# Altium PCB CZ201C_V2.0.PcbDoc (part 1 of 2)
Units mm, origin at the board's own origin, x right, y up, seen from the top; angles counter-clockwise.
Board outline 73 x 60 mm, 2 copper layers (Top Layer, Bottom Layer); 64 components, 36 nets, 200 pads, 72 vias.
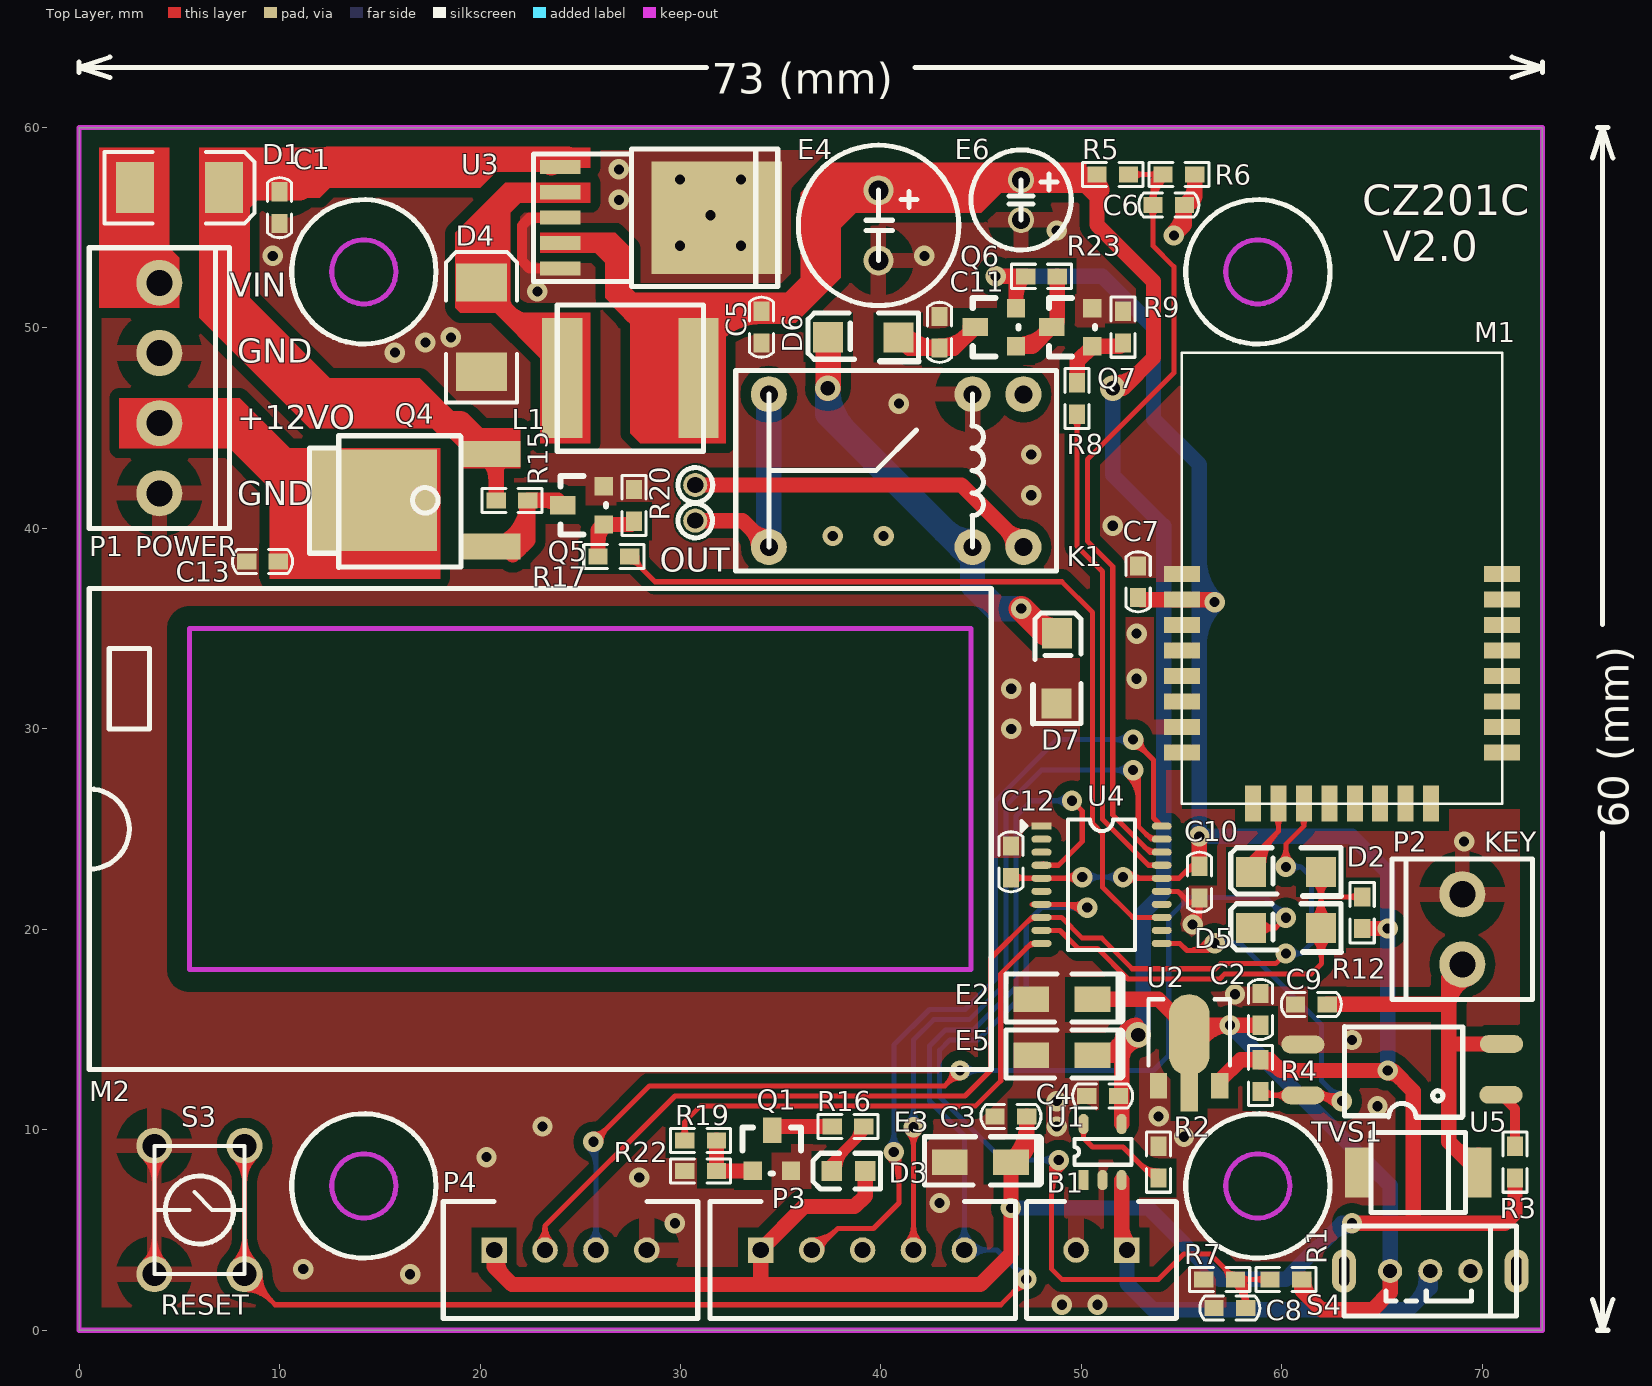
[diagram p0: Top Layer view]
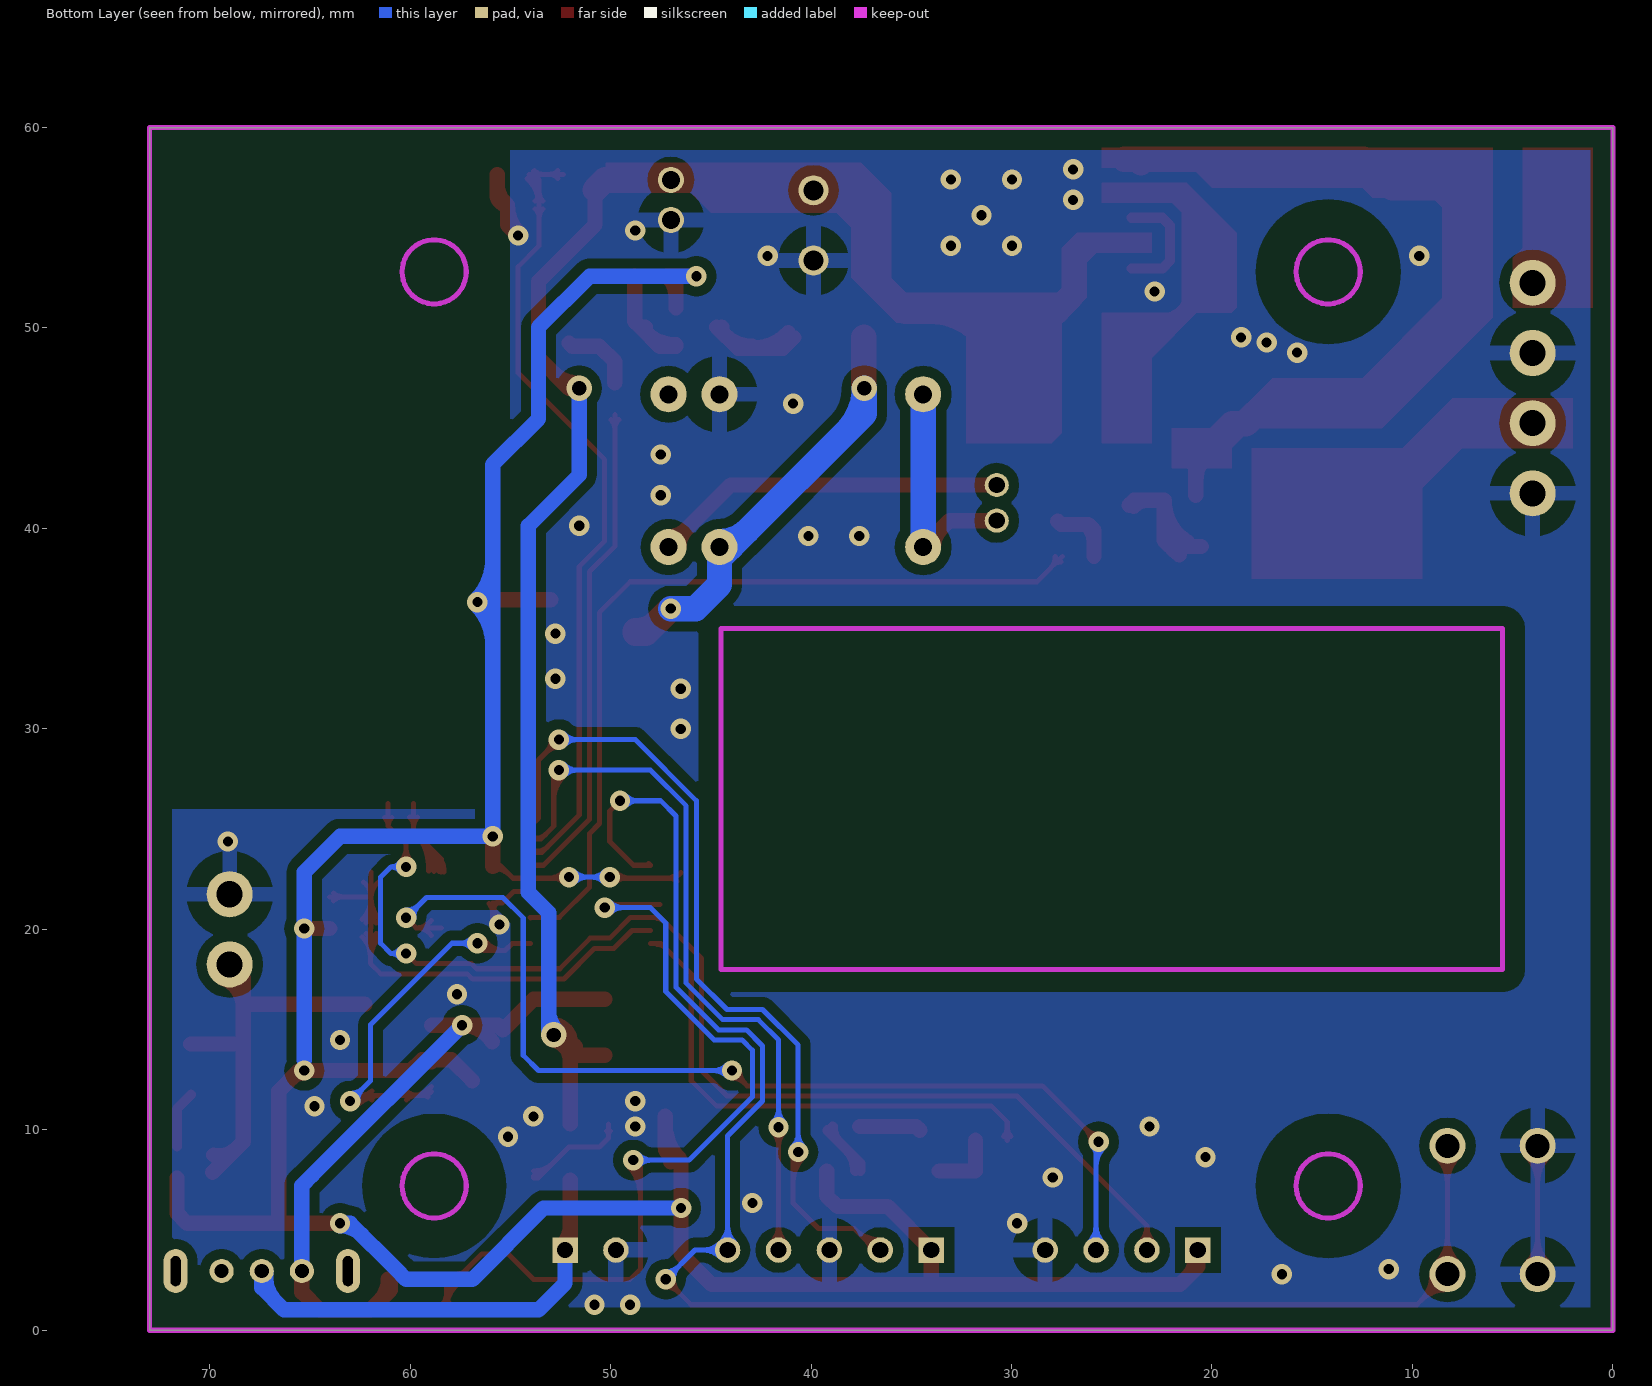
[diagram p1: Bottom Layer view, seen from below]

## Layer stack, top to bottom
Top Layer: signal copper 0.0356
Dielectric: dielectric 0.32, FR-4, Dk 4.8
Bottom Layer: signal copper 0.0356

## Board outline
0,0 73,0 73,60 0,60

## Design rules (kind name [scope] priority, off if disabled: settings)
Clearance "InPoygon to Keep-Out Layer" [InPolygon vs OnLayer('Keep-Out Layer')] p1: gap=1
Clearance "GND to Keep-Out Layer" [InNet('GND') vs OnLayer('Keep-Out Layer')] p2: gap=0.5
Clearance "GND to InPoygon" [InNet('GND') vs InPolygon] p3: gap=1
Clearance "Power Class" [InNetClass('Power Class')] p4: gap=0.5
Clearance "InPoygon to All" [InPolygon] p5: gap=0.5
Clearance [All] p6: gap=0.254
MinimumSolderMaskSliver [All] p1: minsoldermaskwidth=0
PlaneConnect [All] p1: planeconnectstyle=Relief reliefexpansion=0.508 reliefentries=4 reliefconductorwidth=0.508 reliefairgap=0.508
PolygonConnect IsVia [IsVia] p1: connectstyle=Direct reliefconductorwidth=0.254 reliefentries=4 polygonreliefangle="90 Angle"
PolygonConnect IsSMDPad [InSMTComponent] p2: connectstyle=Direct reliefconductorwidth=0.254 reliefentries=4 polygonreliefangle="90 Angle"
PolygonConnect [All] p3: connectstyle=Relief reliefconductorwidth=0.762 reliefentries=4 polygonreliefangle="90 Angle"
RoutingVias [All] p1: holewidth=0.711 width=1.27 viastyle="Through Hole" minholewidth=0.508 minwidth=1.016 maxholewidth=0.711 maxwidth=1.27
SilkToSilkClearance [All] p1: silktosilkclearance=0
SilkscreenOverComponentPads [All] p1: minsilkscreentomaskgap=0
SolderMaskExpansion [All] p1: expansion=0.102
Width [All] p1: maxlimit=25.4 minlimit=0.254 preferedwidth=0.254
24 further rules are at their usual default settings.

## Classes and differential pairs
net class "Power Class": +3.3V +5V +12V +12V_OUT +BAT +BAT_OUT +VIN

## Components (designator, comment, footprint, x,y, rotation, side; value= is the part's Value field where it differs from the comment)
B1 "3.7V" XH2.54-2P-BAT 51,4 r0 top locked
C1 "100nF" 0603_CN 10,56 r270 top
C2 "100nF" 0603_CN 58.928,16.002 r90 top
C3 "100nF" 0603_CN 46.482,10.668 r180 top
C4 "100nF" 0603_CN 51.054,11.684 r180 top
C5 "100nF" 0603_CN 34.036,50.038 r270 top
C6 "100nF" 0603_CN 54.356,56.134 r0 top
C7 "100nF" 0603_CN 52.832,37.338 r270 top
C8 "100nF" 0603_CN 57.404,1.1 r180 top
C9 "100nF" 0603_CN 61.468,16.256 r180 top
C10 "100nF" 0603_CN 55.88,22.352 r270 top
C11 "100nF" 0603_CN 42.926,49.784 r90 top
C12 "100nF" 0603_CN 46.482,23.368 r90 top
C13 "100nF" 0603_CN 9.144,38.354 r180 top
D1 "SS14" DO-214AC(SMA) 5,57 r180 top
D2 "1N4148" LL-34 60.198,22.86 r0 top
D3 "Red" 0603_LED 38.378,7.94 r0 top
D4 "SS14" DO-214AC(SMA) 20.066,50.038 r270 top
D5 "1N4148" LL-34 60.198,20.066 r0 top
D6 "1N4148" LL-34 39.116,49.53 r0 top
D7 "1N4148" LL-34 48.768,33.02 r270 top
E2 "10uF/6.3V" 3216_E 49.022,16.51 r180 top
E3 "10uF/6.3V" 3216_E 44.958,8.382 r180 top
E4 "470uF/16V" CS_470uF/16V 39.878,55.118 r270 top
E5 "10uF/6.3V" 3216_E 49.022,13.716 r180 top
E6 "100uF/16V" CS_100uF/16V 46.99,56.388 r270 top
K1 "HK4100F-DC3V-SHG" HK4100-DC5V-SHG 40.5,42.5 r270 top
L1 "33uH/1A" CDRH74 27.5,47.5 r0 top
M1 "E18-MS1PA2-IPX" E18-MS1PA2-IPX 63,32 r90 top locked
M2 "RF-CHJ-7787Z" RF-CHJ-7787Z 0.5,13 r0 top locked
P1 "POWER" KF3.5-4P 4,47 r270 top locked
P2 "KEY" KF3.5-2P 69,20 r90 top locked
P3 "SWD" XH2.54-5P 34,4 r0 top locked
P4 "ISP" XH2.54-4P 20.7,4 r0 top locked
Q1 "S8050" SOT-23 34.556,8.964 r0 top
Q4 "NCE01P13K" TO-252 17.272,41.402 r90 top
Q5 "S8050" SOT-23 25.146,41.148 r90 top
Q6 "SI2301DS" SOT-23 45.72,50.038 r90 top
Q7 "S8050" SOT-23 49.53,50.038 r90 top
R1 "1M" 0603_RN 60.198,2.54 r0 top
R2 "1.65K" 0603_RN 53.848,8.382 r270 top
R3 "1K" 0603_RN 71.628,8.382 r270 top
R4 "100K" 0603_RN 58.928,12.7 r90 top
R5 "10K" 0603_RN 51.562,57.658 r180 top
R6 "20K" 0603_RN 54.864,57.658 r180 top
R7 "1M" 0603_RN 56.896,2.54 r0 top
R8 "10K" 0603_RN 49.784,46.482 r270 top
R9 "100K" 0603_RN 52.07,50.038 r270 top
R12 "100K" 0603_RN 64.008,20.828 r270 top
R15 "100K" 0603_RN 21.59,41.402 r180 top
R16 "1K" 0603_RN 38.354,10.16 r0 top
R17 "10K" 0603_RN 26.67,38.608 r180 top
R19 "10K" 0603_RN 31,9.472 r180 top
R20 "100K" 0603_RN 27.686,41.148 r270 top
R22 "100K" 0603_RN 31,7.948 r0 top
R23 "100K" 0603_RN 48.006,52.578 r180 top
S3 "RESET" KEY-6*6MM-DIP 6,6 r270 top locked
S4 "SS12D07VG3" SS-12D07G3 67.4,3 r180 top locked
TVS1 "SMBJ6.8CA" DO-214AA(SMB) 66.802,7.874 r180 top
U1 "TP4054" SOT-23-5 51.054,8.89 r90 top
U2 "HT7333-A" SOT-89 55.372,12.192 r0 top
U3 "XL1507-5.0E1" TO-252-5 24,55.5 r270 top
U4 "STM32F030F4P6" TSSOP20 48.006,25.146 r0 top
U5 "PC817" SOP-4 66,13 r180 top

## Footprints (in the part's own frame and the unit in brackets; to place one, negate y for a bottom-side part, rotate by r counter-clockwise, add the part's x,y. Pads: shape width x height; smd on the part's side, far side on the other; paste and mask are expansions set on the pad)
0603_CN [mm] "SMD Resistor"
  rect 0.96x0.8 smd: 1(-0.79,0) 2(0.79,0)
  silkscreen extent -1.5,-0.6 1.5,0.6
0603_LED [mil] "SMD LED"
  rect 40x40 smd: A(33,0) K(-33,0)
  silkscreen extent -70,-35 63,35
0603_RN [mm] "SMD Resistor"
  rect 0.96x0.8 smd: 1(-0.79,0) 2(0.79,0)
  silkscreen extent -1.5,-0.6 1.5,0.6
3216_E [mm] "SMD Tantalum Capacitor"
  rect 1.78x1.27 smd: 1(-1.525,0) 2(1.525,0)
  silkscreen extent -2.92,-1.27 2.79,1.14
CDRH74 [mm]
  rect 2x6 smd: 1(-3.4,0) 2(3.4,0)
  silkscreen extent -3.65,-3.65 3.65,3.65
CS_100uF/16V [mm] "PTH  Electrolytic  Capacitor"
  round 1.3 hole 0.9: 1(-1,0) 2(1,0)
  silkscreen extent -2.5,-2.5 2.5,2.5
CS_470uF/16V [mm] "PTH  Electrolytic  Capacitor"
  round 1.5 hole 1: 1(-1.75,0) 2(1.75,0)
  silkscreen extent -4,-4 4,4
DO-214AA(SMB) [mm] "SMD Diode"
  rect 1.2x2.5 smd: A(3.05,0) K(-3.05,0)
  silkscreen extent -2.35,-2 2.35,2
DO-214AC(SMA) [mil] "SMD Diode"
  rect 75x100 smd: A(87.5,0) K(-87.5,0)
  silkscreen extent -147,-70 148,70
E18-MS1PA2-IPX [mm] "22.5mm*16mm*2.40mm-S"
  rect 0.8x1.8 smd: 1(5.716,7.987) 2(4.446,7.987) 3(3.176,7.987) 4(1.906,7.987) 5(0.636,7.987) 6(-0.634,7.987) 7(-1.904,7.987) 8(-3.174,7.987) 17(-3.174,-7.987) 18(-1.904,-7.987) 19(-0.634,-7.987) 20(0.636,-7.987) 21(1.906,-7.987) 22(3.176,-7.987) 23(4.446,-7.987) 24(5.716,-7.987)
  rect 1.8x0.8 smd: 9(-5.716,4.445) 10(-5.716,3.175) 11(-5.716,1.905) 12(-5.716,0.635) 13(-5.716,-0.635) 14(-5.716,-1.905) 15(-5.716,-3.175) 16(-5.716,-4.445)
  silkscreen extent -5.73,-8 16.77,8
HK4100-DC5V-SHG [mm]
  round 1.8 hole 0.9: 1(-4.191,-6.096) 1(3.429,-6.096) 2(-4.191,6.604) 3(3.429,6.604) 4(3.429,4.064) 5(-4.191,4.064)
  silkscreen extent -5.38,-7.75 4.62,8.25
KEY-6*6MM-DIP [mm]
  round 1.8 hole 1.2: 1(-3.2,2.25) 2(-3.2,-2.25) 3(3.2,-2.25) 4(3.2,2.25)
  silkscreen extent -3.2,-2.25 3.2,2.25
KF3.5-2P [mm]
  round 2.3 hole 1.3: 1(-1.75,0) 2(1.75,0)
  silkscreen extent -3.5,-3.5 3.5,3.5
KF3.5-4P [mm]
  round 2.3 hole 1.3: 1(-5.25,0) 2(-1.75,0) 3(1.75,0) 4(5.25,0)
  silkscreen extent -7,-3.5 7,3.5
LL-34 [mm] "SMD Diode"
  rect 1.5x1.5 smd: A(1.75,-0.008) K(-1.75,0.008)
  silkscreen extent -2.75,-1.19 2.75,1.21
RF-CHJ-7787Z [mm]
  Keep-Out Layer lines w0.254: 5,5 44,5 44,22 5,22 5,5
  silkscreen extent 0,0 45,24
SOP-4 [mil]
  oval 85x35 smd: 1(-194,49.5) 2(-195,-50.5) 3(195,-49.5) 4(195,50.5)
  silkscreen extent -119,-85 113,94
SOT-23 [mil] "SMD Triode Or Diode"
  rect 36x36 smd: 1(-37.5,-40) 2(37.5,-40)
  rect 36x50 smd: 3(0.5,40)
  silkscreen extent -58,-45 58,45
SOT-23-5 [mil]
  rect 40x20 smd: 1(-55,37.4)
  oval 40x20 smd: 2(-55,0) 3(-55,-37.4) 4(55,-37.4) 5(55,37.4)
  silkscreen extent -25,-57 26,55
SOT-89 [mil] "SMD Diode"
  rect 34x50 smd: 1(-60,0) 3(60,0)
  rect 34x100 smd: 2(0,0)
  oval 80x160 smd: 2(0,100)
  silkscreen extent -80,40 80,170
SS-12D07G3 [mm]
  oval 1.2x2.2 hole 0.5 slot 1.5 at 90 deg: 0(-4.3,0.05) 0(4.3,0.05)
  round 1.2 hole 0.7: 1(-2,0.05) 2(0,0.05) 3(2,0.05)
  silkscreen extent -4.3,-2.2 4.3,2.3
TO-252 [mm] "SMD IC"
  rect 1.3x3 smd: 1(-2.3,-3.245) 3(2.3,-3.245)
  rect 5.08x6.35 smd: 2(0,2.592)
  silkscreen extent -3.35,-1.78 3.22,5.79
TO-252-5 [mm] "SMD IC"
  rect 5.6x6.5 smd: 0(0,7.802)
  rect 0.7x2 smd: 1(-2.54,0) 2(-1.27,0) 3(0,0) 4(1.27,0) 5(2.54,0)
  silkscreen extent -3.42,-1.34 3.42,10.85
TSSOP20 [mm]
  rect 1x0.35 smd: 1(0,0)
  oval 1x0.35 smd: 2(0,-0.65) 3(0,-1.3) 4(0,-1.95) 5(0,-2.6) 6(0,-3.25) 7(0,-3.9) 8(0,-4.55) 9(0,-5.2) 10(0,-5.85) 11(6,-5.85) 12(6,-5.2) 13(6,-4.55) 14(6,-3.9) 15(6,-3.25) 16(6,-2.6) 17(6,-1.95) 18(6,-1.3) 19(6,-0.65) 20(6,0)
  silkscreen extent -1,-6.17 4.67,0.33
XH2.54-2P-BAT [mil]
  rect 50x50 hole 32: 1(50,0)
  round 50 hole 32: 2(-50,0)
  silkscreen extent -148,-135 148,95
XH2.54-4P [mil]
  rect 50x50 hole 32: 1(0,0)
  round 50 hole 32: 2(100,0) 3(200,0) 4(300,0)
  silkscreen extent -100,-135 400,95
XH2.54-5P [mil]
  rect 50x50 hole 32: 1(0,0)
  round 50 hole 32: 2(100,0) 3(200,0) 4(300,0) 5(400,0)
  silkscreen extent -100,-135 500,95

## Part data
B1: library part BATTERY
C1 C2 C3 C4 C5 C6 C7 C8 C9 C10 C11 C12 C13: library part Cap1
D1 D4: library part Diode-A
D2 D5 D6 D7: library part Diode-B
D3: library part LED
E2 E3 E5: library part "Cap Ta"
E4 E6: library part "Cap Pol1"
K1: library part HK4100F-DC5V-SHG, "HK4100-DC5V-SHG,HRS1H-S-DC5V"
L1: library part Inductor
P1: library part "Header 4", "Header, 4-Pin"
P2: library part "Header 2", "Header, 2-Pin"
P4: library part ISP_UART
Q1 Q5 Q7: library part 8050
Q4: library part PMOS-2, "P-Channel Power MOSFET"
Q6: library part "MOSFET P"
R1 R2 R3 R4 R5 R6 R7 R8 R9 R12 R15 R16 R17 R19 R20 R22 R23: library part Res1
S3: library part SW-4
S4: library part SS-12D07G3
TVS1: library part Diode-C
U1: library part QX4054, "TP4054,LTC4054 ,PJ4054MR"
U2: library part HT7833, "HT7533; Output 500mA; Iq: 5uA, max= 7uA"
U3: library part XL1507

## Free pads (board coordinates)
  round 1.2 hole 0.8: 0(30.734,42.164) 1(30.734,40.386)

## Via types
v1: diameter 1.016, hole 0.508, Top Layer to Bottom Layer, 69 vias
v2: diameter 1.27, hole 0.711, Top Layer to Bottom Layer, 3 vias

## Nets (pads, with @x,y where several pads share a name; then routed paths per layer and width w, separated by ;. In a path a pad name is that pad's centre, name@x,y a point inside that pad or via, vN(x,y) a via of type N, cw(c..) or ccw(c..) an arc to the next point about the centre after c; other vN are vias at no path point)
+3.3V: C3.1 C7.2 C10.1 C12.1 D3.A E3.1 M1.2 P3.1 P4.1 Q6.2 R3.2 R4.2 R12.2 R23.2 U2.3 U4.5 U4.16 | length 236.8
  Top Layer w0.254: C12.1@46.482,22.832 46.768,22.546 U4.5@48.006,22.546 v1@49.978,22.546 ; v1(52.07,22.606) 52.13,22.546 U4.16@54.006,22.546 54.864,22.546 55.46,23.142 ; C10.1@55.88,23.142 55.46,23.142 ; 55.026,22.708 cw(c55.837,21.897) C10.1@55.879,23.043 ; 55.026,22.708 cw(c55.837,21.897) C10.1@55.879,23.043 ; 55.026,22.708 cw(c55.837,21.897) C10.1@55.879,23.043 ; 55.25,22.932 cw(c55.477,22.705) C10.1@55.695,22.941 ; 55.25,22.932 cw(c55.477,22.705) C10.1@55.695,22.941 ; 55.25,22.932 cw(c55.477,22.705) C10.1@55.695,22.941 ; 55.437,23.119 cw(c55.657,22.9) C10.1@55.867,23.128 ; 55.437,23.119 cw(c55.657,22.9) C10.1@55.867,23.128 ; 55.437,23.119 cw(c55.657,22.9) C10.1@55.867,23.128 ; 55.438,23.12 cw(c55.866,22.691) C10.1@55.889,23.297 ; 55.438,23.12 cw(c55.866,22.691) C10.1@55.889,23.297 ; 55.438,23.12 cw(c55.866,22.691) C10.1@55.889,23.297 ; 55.46,23.142 ccw(c55.46,23.329) C10.1@55.631,23.253 ; 55.46,23.142 cw(c55.46,22.955) C10.1@55.631,23.031 ; 55.46,23.142 ccw(c55.46,23.329) C10.1@55.631,23.253 ; 55.46,23.142 cw(c55.46,22.955) C10.1@55.631,23.031 ; 55.46,23.142 ccw(c55.46,23.329) C10.1@55.631,23.253 ; 55.46,23.142 cw(c55.46,22.955) C10.1@55.631,23.031 ; C12.1@46.675,22.385 cw(c47.064,21.996) 47.064,22.546 ccw(c47.064,21.996) C12.1@46.675,22.385 ; C12.1@46.675,22.771 ccw(c47.218,23.314) 47.218,22.546 cw(c47.218,23.314) C12.1@46.675,22.771 ; 48.973,22.546 ccw(c48.973,23.671) 49.769,22.875 cw(c48.973,23.671) 48.973,22.546 ; 49.263,22.546 cw(c49.263,21.831) 49.769,22.337 ccw(c49.263,21.831) 49.263,22.546 ; v1@52.339,22.337 cw(c52.845,21.831) 52.845,22.546 ccw(c52.845,21.831) v1@52.339,22.337 ; v1@52.339,22.875 ccw(c53.135,23.671) 53.135,22.546 cw(c53.135,23.671) v1@52.339,22.875
  Top Layer w0.762: P4.1@20.7,4 20.7,3.176 21.59,2.286 33.782,2.286 ; D3.A@39.216,7.94 39.216,6.704 38.68,6.168 36.168,6.168 P3.1@34,4 34,2.504 33.782,2.286 ; v1(45.72,52.578) R23.2@46.736,52.578 ; Q6.2@46.736,50.99 R23.2@46.736,52.578 ; E3.1@46.764,8.663 E3.1@46.483,8.382 ; R23.2@47.216,52.578 R23.2@46.736,52.578 ; C3.1@47.272,10.668 47.272,9.171 ; C7.2@52.984,36.446 M1.2@55.013,36.446 56.518,36.446 v1(56.642,36.322) ; C10.1@55.88,23.142 v1(55.88,24.638) ; U2.3@56.896,12.446 57.94,13.49 R4.2@58.928,13.49 59.408,13.49 59.944,12.954 v1(65.278,12.954) ; v1(63.5,5.334) 66.548,5.334 ; R12.2@64.008,20.038 v1(65.278,20.038) ; v1@65.532,12.954 66.548,11.938 66.548,5.334 ; R3.2@71.628,7.592 71.628,5.842 71.12,5.334 66.548,5.334 ; P4.1@20.935,3.904 ccw(c21.964,3.484) 21.178,2.698 ; P4.1@20.935,3.904 ccw(c21.964,3.484) 21.178,2.698 ; P4.1@20.935,3.904 ccw(c21.964,3.484) 21.178,2.698 ; 33.782,2.286 44.958,2.286 46.483,3.811 E3.1@46.483,8.382 ; E3.1@46.483,8.382 47.272,9.171 ; E3.1@46.558,8.562 ccw(c44.836,10.284) C3.1@47.272,10.284 ; E3.1@46.558,8.562 ccw(c44.836,10.284) C3.1@47.272,10.284 ; E3.1@46.558,8.562 ccw(c44.836,10.284) C3.1@47.272,10.284 ; 46.736,51.566 cw(c48.148,51.566) R23.2@47.149,52.565 ; 46.736,51.566 cw(c48.148,51.566) R23.2@47.149,52.565 ; 46.736,51.566 cw(c48.148,51.566) R23.2@47.149,52.565 ; E3.1@46.738,8.636 ccw(c46.737,9.171) 47.272,9.171 ; E3.1@46.738,8.636 ccw(c46.737,9.171) 47.272,9.171 ; E3.1@46.738,8.636 ccw(c46.737,9.171) 47.272,9.171 ; E3.1@46.991,8.403 cw(c47.958,8.485) 47.272,9.171 ; E3.1@46.991,8.403 cw(c47.958,8.485) 47.272,9.171 ; E3.1@46.991,8.403 cw(c47.958,8.485) 47.272,9.171 ; v1@65.278,12.827 cw(c65.278,11.907) 65.928,12.558 ; v1@65.278,12.827 cw(c65.278,11.907) 65.928,12.558 ; v1@65.278,12.827 cw(c65.278,11.907) 65.928,12.558 ; 56.036,36.446 cw(c56.036,35.716) 56.552,36.232 ccw(c56.036,35.716) 56.036,36.446 ; R4.2@58.928,13.391 cw(c58.928,11.993) 59.916,12.982 ccw(c58.928,11.993) R4.2@58.928,13.391 ; R4.2@58.934,13.392 cw(c59.162,12.684) 59.688,13.21 ccw(c59.162,12.684) R4.2@58.934,13.392
  Bottom Layer w0.254: v1(50.038,22.606) v1(52.07,22.606) ; v1@50.307,22.337 cw(c50.958,21.686) 50.958,22.606 ; v1@50.307,22.337 cw(c50.958,21.686) 50.958,22.606 ; v1@50.307,22.337 cw(c50.958,21.686) 50.958,22.606 ; v1@50.307,22.875 ccw(c50.958,23.526) 50.958,22.606 ; v1@50.307,22.875 ccw(c50.958,23.526) 50.958,22.606 ; v1@50.307,22.875 ccw(c50.958,23.526) 50.958,22.606 ; 51.15,22.606 ccw(c51.15,23.526) v1@51.801,22.875 ; 51.15,22.606 cw(c51.15,21.686) v1@51.801,22.337 ; 51.15,22.606 ccw(c51.15,23.526) v1@51.801,22.875 ; 51.15,22.606 cw(c51.15,21.686) v1@51.801,22.337 ; 51.15,22.606 ccw(c51.15,23.526) v1@51.801,22.875 ; 51.15,22.606 cw(c51.15,21.686) v1@51.801,22.337
  Bottom Layer w0.762: v1(45.72,52.578) 51.054,52.578 53.594,50.038 53.594,45.466 55.88,43.18 v1(55.88,24.638) 63.5,24.638 65.278,22.86 v1(65.278,20.038) 65.278,13.462 ; v1(46.482,6.096) 53.34,6.096 56.896,2.54 60.198,2.54 60.706,3.048 62.992,5.334 v1(63.5,5.334) ; 55.88,34.176 cw(c58.788,34.176) v1@56.732,36.232 ; 55.88,34.176 cw(c58.788,34.176) v1@56.732,36.232 ; 55.88,34.176 cw(c58.788,34.176) v1@56.732,36.232 ; 55.88,36.015 cw(c56.949,36.015) 56.193,36.771 ; 55.88,36.015 cw(c56.949,36.015) 56.193,36.771 ; 55.88,36.015 cw(c56.949,36.015) 56.193,36.771 ; 55.88,36.629 ccw(c56.949,36.629) 56.193,35.873 ; 55.88,36.629 ccw(c56.949,36.629) 56.193,35.873 ; 55.88,36.629 ccw(c56.949,36.629) 56.193,35.873 ; 55.88,38.468 ccw(c58.788,38.468) v1@56.732,36.412 ; 55.88,38.468 ccw(c58.788,38.468) v1@56.732,36.412 ; 55.88,38.468 ccw(c58.788,38.468) v1@56.732,36.412 ; 62.416,4.758 cw(c63.5,3.674) 63.5,5.207 ccw(c63.5,3.674) 62.416,4.758
+5V: C4.1 C5.1 E4.1 E5.1 E6.1 L1.2 R5.2 U1.4 U3.4 | length 166.6
  Top Layer w0.762: E5.1@50.293,13.716 52.004,13.716 ; 50.772,56.896 50.772,55.146 53.594,52.324 53.594,48.514 v2@52.07,46.99 ; U1.4@52.004,10.287 52.004,13.716 ; v2@52.324,14.732 52.004,14.412 52.004,13.716 ; v2@51.562,47.244 ccw(c51.562,49.084) 52.863,47.783 ; v2@51.562,47.244 ccw(c51.562,49.084) 52.863,47.783 ; v2@51.562,47.244 ccw(c51.562,49.084) 52.863,47.783 ; 51.75,14.158 cw(c52.578,13.33) v2@52.787,14.482 ; 51.75,14.158 cw(c52.578,13.33) v2@52.787,14.482 ; 51.75,14.158 cw(c52.578,13.33) v2@52.787,14.482 ; 52.004,13.421 cw(c53.085,13.421) v2@52.88,14.483 ; 52.004,13.421 cw(c53.085,13.421) v2@52.88,14.483 ; 52.004,13.421 cw(c53.085,13.421) v2@52.88,14.483 ; 52.004,14.344 cw(c52.907,14.344) v2@52.736,15.231 ; 52.004,14.344 cw(c52.907,14.344) v2@52.736,15.231 ; 52.004,14.344 cw(c52.907,14.344) v2@52.736,15.231
  Top Layer w1: U3.4@24,54.23 26.034,54.23 26.924,53.34 26.924,51.476 L1.2@30.9,47.5 ; 27.924,50.476 ccw(c29.69,52.241) L1.2@30.698,49.957 ; 27.924,50.476 ccw(c29.69,52.241) L1.2@30.698,49.957 ; 27.924,50.476 ccw(c29.69,52.241) L1.2@30.698,49.957 ; 28.956,49.444 ccw(c30.322,50.809) L1.2@31.102,49.043 ; 28.956,49.444 ccw(c30.322,50.809) L1.2@31.102,49.043 ; 28.956,49.444 ccw(c30.322,50.809) L1.2@31.102,49.043 ; L1.2@29.989,48.411 ccw(c30.954,49.377) L1.2@31.506,48.128 ; L1.2@29.989,48.411 ccw(c30.954,49.377) L1.2@31.506,48.128 ; L1.2@29.989,48.411 ccw(c30.954,49.377) L1.2@31.506,48.128
  Top Layer w1.27: 50.28,57.388 E6.1@46.99,57.388 41.402,57.388 ; R5.2@50.391,57.277 50.772,56.896 ; 27.714,50.828 cw(c27.714,47.349) L1.2@30.597,49.296 ; 27.714,50.828 cw(c27.714,47.349) L1.2@30.597,49.296 ; 27.714,50.828 cw(c27.714,47.349) L1.2@30.597,49.296 ; 27.714,50.828 C5.1@34.036,50.828 ; 30.104,50.828 cw(c30.104,48.963) L1.2@31.65,50.006 ; 30.104,50.828 cw(c30.104,48.963) L1.2@31.65,50.006 ; 30.104,50.828 cw(c30.104,48.963) L1.2@31.65,50.006 ; C5.1@34.036,50.828 ccw(c34.036,47.442) 31.205,49.3 cw(c34.036,47.442) C5.1@34.036,50.828 ; C5.1@34.036,50.828 35.334,50.828 36.83,52.324 36.83,56.134 38.084,57.388 41.402,57.388 ; 38.345,57.388 cw(c38.345,55.335) E4.1@39.797,56.787 ; 38.345,57.388 cw(c38.345,55.335) E4.1@39.797,56.787 ; 38.345,57.388 cw(c38.345,55.335) E4.1@39.797,56.787 ; E4.1@39.96,56.787 cw(c41.402,55.357) 41.402,57.388 ; E4.1@39.96,56.787 cw(c41.402,55.357) 41.402,57.388 ; E4.1@39.96,56.787 cw(c41.402,55.357) 41.402,57.388 ; L1.2@30.143,49.996 cw(c31.684,48.986) 31.684,50.828 ccw(c31.684,48.986) L1.2@30.143,49.996
  Bottom Layer w0.762: v2(51.562,46.99) 51.562,42.672 54.102,40.132 54.102,21.844 53.086,20.828 53.086,14.986 v2(52.832,14.732) ; v2@52.652,14.912 ccw(c51.606,15.958) 53.086,15.958 ; v2@52.652,14.912 ccw(c51.606,15.958) 53.086,15.958 ; v2@52.652,14.912 ccw(c51.606,15.958) 53.086,15.958
+12V: C1.1 D1.K Q4.3 R15.2 U3.1 | length 51.5
  Top Layer w0.762: R15.2@20.8,41.656 Q4.3@20.8,43.419 ; Q4.3@20.327,43.512 cw(c19.184,42.369) 20.8,42.369 ; Q4.3@20.327,43.512 cw(c19.184,42.369) 20.8,42.369 ; Q4.3@20.327,43.512 cw(c19.184,42.369) 20.8,42.369
  Top Layer w1.27: Q4.3@20.8,43.419 Q4.3@20.517,43.702 19.007,45.212 18.288,45.212 16.764,46.736 12.192,46.736 7.223,51.705 D1.K@7.223,57 11,57 12.42,58.42 24.384,58.42 ; 19.04,45.179 cw(c17.564,43.702) Q4.3@19.652,43.702 ; 19.04,45.179 cw(c17.564,43.702) Q4.3@19.652,43.702 ; 19.04,45.179 cw(c17.564,43.702) Q4.3@19.652,43.702 ; 23.121,58.42 cw(c23.121,57.811) 23.552,58.242 ccw(c23.121,57.811) 23.121,58.42
+12V_OUT: C13.1 P1.3 Q4.2 | length 24.6
  Top Layer w0.762: C13.1@10.188,38.354 10.188,43.043 10.242,43.098 ; Q4.2@14.68,41.656 Q4.2@14.934,41.656 ; C13.1@10.001,38.367 ccw(c9.548,38.82) 10.188,38.82 ; C13.1@10.001,38.367 ccw(c9.548,38.82) 10.188,38.82 ; C13.1@10.001,38.367 ccw(c9.548,38.82) 10.188,38.82
  Top Layer w1.27: P1.3@4,45.25 8.09,45.25 10.242,43.098 11.684,41.656 Q4.2@14.68,41.656 ; P1.3@4.364,44.886 cw(c5.243,44.007) 5.243,45.25 ; P1.3@4.364,44.886 cw(c5.243,44.007) 5.243,45.25 ; P1.3@4.364,44.886 cw(c5.243,44.007) 5.243,45.25 ; P1.3@4.364,45.614 ccw(c5.243,46.493) 5.243,45.25 ; P1.3@4.364,45.614 ccw(c5.243,46.493) 5.243,45.25 ; P1.3@4.364,45.614 ccw(c5.243,46.493) 5.243,45.25
+BAT: B1.1 S4.2 U1.3 | length 30.7
  Top Layer w0.762: U1.3@52.004,7.493 52.004,4.266 B1.1@52.27,4 ; 52.004,5.255 ccw(c53.525,5.255) B1.1@52.45,4.18 ; 52.004,5.255 ccw(c53.525,5.255) B1.1@52.45,4.18 ; 52.004,5.255 ccw(c53.525,5.255) B1.1@52.45,4.18
  Bottom Layer w0.762: B1.1@52.27,4 52.27,3.61 52.27,2.34 53.594,1.016 66.294,1.016 67.4,2.122 S4.2@67.4,2.95 ; 66.708,1.43 ccw(c65.503,2.635) S4.2@67.184,2.914 ; 66.708,1.43 ccw(c65.503,2.635) S4.2@67.184,2.914 ; 66.708,1.43 ccw(c65.503,2.635) S4.2@67.184,2.914
+BAT_OUT: C2.1 E2.1 R1.2 S4.3 U2.2 | length 40.7
  Top Layer w0.762: E2.1@50.293,16.51 53.848,16.51 55.372,14.986 55.598,15.212 v1(57.404,15.212) ; C2.1@58.928,15.212 v1(57.404,15.212) ; R1.2@60.988,2.54 60.988,2.004 61.976,1.016 64.516,1.016 65.4,1.9 S4.3@65.4,2.95 ; U2.2@55.908,14.391 cw(c57.404,13.438) v1(57.404,15.212) ; U2.2@55.908,14.391 cw(c57.404,13.438) v1(57.404,15.212) ; U2.2@55.908,14.391 cw(c57.404,13.438) v1(57.404,15.212) ; R1.2@61.087,2.54 ccw(c62.62,2.54) 61.536,1.456 ; R1.2@61.087,2.54 ccw(c62.62,2.54) 61.536,1.456 ; R1.2@61.087,2.54 ccw(c62.62,2.54) 61.536,1.456
  Bottom Layer w0.762: v1(57.404,15.212) 64.881,7.735 65.4,7.216 S4.3@65.4,2.95
+VIN: D1.A P1.1 | length 15.9
  Top Layer w2.032: D1.A@2.778,57 2.778,53.473 P1.1@4,52.25 ; 2.778,55.525 ccw(c7.275,55.525) P1.1@4.095,52.345 ; 2.778,55.525 ccw(c7.275,55.525) P1.1@4.095,52.345 ; 2.778,55.525 ccw(c7.275,55.525) P1.1@4.095,52.345
BAT_VOL: C8.1 R1.1 R7.2 U4.7 | length 94.4
  Top Layer w0.254: U4.7@47.545,21.246 U4.7@48.006,21.246 50.128,21.246 v1(50.292,21.082) ; v1@48.768,8.382 48.514,8.128 48.514,3.048 49.022,2.54 53.848,2.54 55.118,3.81 56.416,3.81 R7.2@57.686,2.54 ; C8.1@58.194,1.016 C8.1@58.194,1.1 58.194,2.032 R7.2@57.686,2.54 ; R1.1@59.408,2.54 R7.2@57.686,2.54 ; 48.514,6.702 cw(c50.655,6.702) v1@49.141,8.216 ; 48.514,6.702 cw(c50.655,6.702) v1@49.141,8.216 ; 48.514,6.702 cw(c50.655,6.702) v1@49.141,8.216 ; 48.514,7.316 cw(c50.042,7.316) v1@48.962,8.396 ; 48.514,7.316 cw(c50.042,7.316) v1@48.962,8.396 ; 48.514,7.316 cw(c50.042,7.316) v1@48.962,8.396 ; 48.514,7.929 cw(c49.429,7.929) v1@48.782,8.576 ; 48.514,7.929 cw(c49.429,7.929) v1@48.782,8.576 ; 48.514,7.929 cw(c49.429,7.929) v1@48.782,8.576 ; 48.976,21.246 cw(c48.976,19.766) v1@50.023,20.813 ; 48.976,21.246 cw(c48.976,19.766) v1@50.023,20.813 ; 48.976,21.246 cw(c48.976,19.766) v1@50.023,20.813 ; 49.589,21.246 cw(c49.589,20.379) v1@50.202,20.992 ; 49.589,21.246 cw(c49.589,20.379) v1@50.202,20.992 ; 49.589,21.246 cw(c49.589,20.379) v1@50.202,20.992 ; 49.768,21.246 ccw(c49.768,21.606) v1@50.023,21.351 ; 49.768,21.246 ccw(c49.768,21.606) v1@50.023,21.351 ; 49.768,21.246 ccw(c49.768,21.606) v1@50.023,21.351 ; 57.083,3.143 cw(c56.481,2.54) R7.2@57.333,2.54 ; 57.083,3.143 cw(c56.481,2.54) R7.2@57.333,2.54 ; 57.083,3.143 cw(c56.481,2.54) R7.2@57.333,2.54 ; 57.277,2.949 ccw(c57.606,3.279) R7.2@57.606,2.813 ; 57.277,2.949 ccw(c57.606,3.279) R7.2@57.606,2.813 ; 57.277,2.949 ccw(c57.606,3.279) R7.2@57.606,2.813 ; R7.2@57.591,2.331 cw(c56.507,1.038) C8.1@58.194,1.038 ; R7.2@57.591,2.331 cw(c56.507,1.038) C8.1@58.194,1.038 ; R7.2@57.591,2.331 cw(c56.507,1.038) C8.1@58.194,1.038 ; R7.2@57.754,2.525 cw(c56.963,1.582) 58.194,1.582 ; R7.2@57.754,2.525 cw(c56.963,1.582) 58.194,1.582 ; R7.2@57.754,2.525 cw(c56.963,1.582) 58.194,1.582 ; R7.2@57.766,2.267 cw(c57.766,1.801) 58.095,2.131 ; R7.2@57.766,2.267 cw(c57.766,1.801) 58.095,2.131 ; R7.2@57.766,2.267 cw(c57.766,1.801) 58.095,2.131 ; R7.2@57.917,2.72 cw(c57.419,2.126) 58.194,2.126 ; R7.2@57.917,2.72 cw(c57.419,2.126) 58.194,2.126 ; R7.2@57.917,2.72 cw(c57.419,2.126) 58.194,2.126 ; R7.2@57.959,2.347 cw(c58.425,1.881) 58.425,2.54 ; R7.2@57.959,2.347 cw(c58.425,1.881) 58.425,2.54 ; R7.2@57.959,2.347 cw(c58.425,1.881) 58.425,2.54 ; R7.2@57.959,2.733 ccw(c58.425,3.199) 58.425,2.54 ; R7.2@57.959,2.733 ccw(c58.425,3.199) 58.425,2.54 ; R7.2@57.959,2.733 ccw(c58.425,3.199) 58.425,2.54 ; C8.1@58.001,1.293 ccw(c57.535,1.759) 58.194,1.759 ; C8.1@58.001,1.293 ccw(c57.535,1.759) 58.194,1.759 ; C8.1@58.001,1.293 ccw(c57.535,1.759) 58.194,1.759 ; R7.2@58.033,2.483 ccw(c58.47,2.388) 58.154,2.072 ; R7.2@58.033,2.483 ccw(c58.47,2.388) 58.154,2.072 ; R7.2@58.033,2.483 ccw(c58.47,2.388) 58.154,2.072 ; 58.194,1.759 ccw(c58.853,1.759) C8.1@58.387,1.293 ; 58.194,1.759 ccw(c58.853,1.759) C8.1@58.387,1.293 ; 58.194,1.759 ccw(c58.853,1.759) C8.1@58.387,1.293 ; 58.669,2.54 ccw(c58.669,3.199) R1.1@59.135,2.733 ; 58.669,2.54 cw(c58.669,1.881) R1.1@59.135,2.347 ; 58.669,2.54 ccw(c58.669,3.199) R1.1@59.135,2.733 ; 58.669,2.54 cw(c58.669,1.881) R1.1@59.135,2.347 ; 58.669,2.54 ccw(c58.669,3.199) R1.1@59.135,2.733 ; 58.669,2.54 cw(c58.669,1.881) R1.1@59.135,2.347
  Bottom Layer w0.254: v1(48.872,8.486) 46.081,8.486 42.926,11.64 42.928,11.642 42.928,13.972 43.434,14.478 44.827,14.478 47.244,16.895 47.244,20.32 48.006,21.082 v1(50.292,21.082) ; 47.952,8.486 ccw(c47.952,9.406) v1@48.602,8.755 ; 47.952,8.486 cw(c47.952,7.566) v1@48.602,8.216 ; 47.952,8.486 ccw(c47.952,9.406) v1@48.602,8.755 ; 47.952,8.486 cw(c47.952,7.566) v1@48.602,8.216 ; 47.952,8.486 ccw(c47.952,9.406) v1@48.602,8.755 ; 47.952,8.486 cw(c47.952,7.566) v1@48.602,8.216 ; 49.372,21.082 ccw(c49.372,22.002) v1@50.023,21.351 ; 49.372,21.082 cw(c49.372,20.162) v1@50.023,20.813 ; 49.372,21.082 ccw(c49.372,22.002) v1@50.023,21.351 ; 49.372,21.082 cw(c49.372,20.162) v1@50.023,20.813 ; 49.372,21.082 ccw(c49.372,22.002) v1@50.023,21.351 ; 49.372,21.082 cw(c49.372,20.162) v1@50.023,20.813
E18_UART_RX: D2.K M1.10 | length 25.7
  Top Layer w0.254: D2.K@58.448,22.868 58.448,23.515 59.825,24.892 ; M1.10@59.825,26.284 59.825,24.892 ; D2.K@58.309,22.859 cw(c59.395,22.924) 58.626,23.693 ; D2.K@58.309,22.859 cw(c59.395,22.924) 58.626,23.693 ; D2.K@58.309,22.859 cw(c59.395,22.924) 58.626,23.693 ; D2.K@58.563,22.874 cw(c60.15,22.969) 59.026,24.093 ; D2.K@58.563,22.874 cw(c60.15,22.969) 59.026,24.093 ; D2.K@58.563,22.874 cw(c60.15,22.969) 59.026,24.093 ; D2.K@58.816,22.889 cw(c60.904,23.013) 59.425,24.492 ; D2.K@58.816,22.889 cw(c60.904,23.013) 59.425,24.492 ; D2.K@58.816,22.889 cw(c60.904,23.013) 59.425,24.492 ; D2.K@59.07,22.905 cw(c61.659,23.058) 59.825,24.892 ; D2.K@59.07,22.905 cw(c61.659,23.058) 59.825,24.892 ; D2.K@59.07,22.905 cw(c61.659,23.058) 59.825,24.892 ; M1.10@59.632,25.591 cw(c59.166,25.125) 59.825,25.125 ; M1.10@59.632,25.591 cw(c59.166,25.125) 59.825,25.125 ; M1.10@59.632,25.591 cw(c59.166,25.125) 59.825,25.125 ; 59.825,25.125 cw(c60.484,25.125) M1.10@60.018,25.591 ; 59.825,25.125 cw(c60.484,25.125) M1.10@60.018,25.591 ; 59.825,25.125 cw(c60.484,25.125) M1.10@60.018,25.591
GND: B1.2 C1.2 C2.2 C3.2 C4.2 C5.2 C6.2 C7.1 C8.2 C9.2 C10.2 C11.2 C12.2 C13.2 D4.A D7.A E2.2 E3.2 E4.2 E5.2 E6.2 K1.5 M1.1 M1.7 P1.2 P1.4 P2.2 P3.3 P4.4 Q1.2 Q5.2 Q7.2 R2.1 R6.1 R7.1 R9.1 R20.1 R22.1 S3.2 S3.3 TVS1.A U1.2 U2.1 U3.0 U3.3 U3.5 U4.1 U4.15 U5.3 | length 68.2
  Top Layer w0.254: S3.3@3.75,2.8 S3.2@3.75,9.2 ; U4.15@54.006,21.896 54.812,21.896 55.4,21.308 ; v1@55.372,20.066 55.88,20.574 C10.2@55.88,21.308 ; S3.3@3.203,3.347 ccw(c1.884,4.666) 3.75,4.666 ; S3.3@3.203,3.347 ccw(c1.884,4.666) 3.75,4.666 ; S3.3@3.203,3.347 ccw(c1.884,4.666) 3.75,4.666 ; S3.2@3.203,8.653 cw(c1.884,7.334) 3.75,7.334 ; S3.2@3.203,8.653 cw(c1.884,7.334) 3.75,7.334 ; S3.2@3.203,8.653 cw(c1.884,7.334) 3.75,7.334 ; S3.3@3.383,3.167 ccw(c2.497,4.053) 3.75,4.053 ; S3.3@3.383,3.167 ccw(c2.497,4.053) 3.75,4.053 ; S3.3@3.383,3.167 ccw(c2.497,4.053) 3.75,4.053 ; S3.2@3.383,8.833 cw(c2.497,7.947) 3.75,7.947 ; S3.2@3.383,8.833 cw(c2.497,7.947) 3.75,7.947 ; S3.2@3.383,8.833 cw(c2.497,7.947) 3.75,7.947 ; 3.75,4.053 ccw(c5.003,4.053) S3.3@4.117,3.167 ; 3.75,4.053 ccw(c5.003,4.053) S3.3@4.117,3.167 ; 3.75,4.053 ccw(c5.003,4.053) S3.3@4.117,3.167 ; 3.75,4.666 ccw(c5.616,4.666) S3.3@4.297,3.347 ; 3.75,4.666 ccw(c5.616,4.666) S3.3@4.297,3.347 ; 3.75,4.666 ccw(c5.616,4.666) S3.3@4.297,3.347 ; 3.75,7.334 cw(c5.616,7.334) S3.2@4.297,8.653 ; 3.75,7.334 cw(c5.616,7.334) S3.2@4.297,8.653 ; 3.75,7.334 cw(c5.616,7.334) S3.2@4.297,8.653 ; 3.75,7.947 cw(c5.003,7.947) S3.2@4.117,8.833 ; 3.75,7.947 cw(c5.003,7.947) S3.2@4.117,8.833 ; 3.75,7.947 cw(c5.003,7.947) S3.2@4.117,8.833 ; 55.4,21.308 ccw(c55.4,21.516) C10.2@55.608,21.501 ; 55.4,21.308 ccw(c55.4,21.516) C10.2@55.608,21.501 ; 55.4,21.308 ccw(c55.4,21.516) C10.2@55.608,21.501 ; 55.4,21.308 C10.2@55.88,21.308 ; v1@55.402,20.594 ccw(c55.107,21.308) C10.2@55.88,21.308 ; v1@55.402,20.594 ccw(c55.107,21.308) C10.2@55.88,21.308 ; v1@55.402,20.594 ccw(c55.107,21.308) C10.2@55.88,21.308 ; v1@55.499,20.359 ccw(c55.264,20.928) 55.88,20.928 ; v1@55.499,20.359 ccw(c55.264,20.928) 55.88,20.928 ; v1@55.499,20.359 ccw(c55.264,20.928) 55.88,20.928 ; C10.2@55.687,21.289 cw(c55.221,20.823) 55.88,20.823 ; C10.2@55.687,21.289 cw(c55.221,20.823) 55.88,20.823 ; C10.2@55.687,21.289 cw(c55.221,20.823) 55.88,20.823 ; 55.88,20.823 cw(c56.539,20.823) C10.2@56.073,21.289 ; 55.88,20.823 cw(c56.539,20.823) C10.2@56.073,21.289 ; 55.88,20.823 cw(c56.539,20.823) C10.2@56.073,21.289
  Top Layer w0.508: U3.5@24,52.96 22.478,52.96 22.098,53.34 22.098,55.118 22.48,55.5 U3.3@24,55.5
  Top Layer w0.762: v1(54.61,54.61) 55.146,55.146 C6.2@55.146,56.134 ; R6.1@55.654,57.658 55.654,56.642 ; v1@54.523,54.703 ccw(c53.19,56.134) C6.2@55.146,56.134 ; v1@54.523,54.703 ccw(c53.19,56.134) C6.2@55.146,56.134 ; v1@54.523,54.703 ccw(c53.19,56.134) C6.2@55.146,56.134 ; C6.2@55.146,56.134 55.654,56.642 ; C6.2@55.213,56.147 ccw(c54.147,57.213) 55.654,57.213 ; C6.2@55.213,56.147 ccw(c54.147,57.213) 55.654,57.213 ; C6.2@55.213,56.147 ccw(c54.147,57.213) 55.654,57.213 ; C6.2@55.224,56.153 ccw(c55.161,56.642) 55.654,56.642 ; C6.2@55.224,56.153 ccw(c55.161,56.642) 55.654,56.642 ; C6.2@55.224,56.153 ccw(c55.161,56.642) 55.654,56.642
  other v1: 49.022,1.27 50.8,1.27 16.51,2.794 11.176,3.048 29.718,5.334 42.926,6.35 27.94,7.62 20.32,8.636 55.118,9.652 23.114,10.16 48.768,10.16 53.848,10.668 64.77,11.176 48.768,11.43 63.5,14.478 57.658,16.764 55.548,20.242 69.088,24.384 46.5,30 46.5,32 52.75,32.5 52.75,34.75 37.592,39.624 40.132,39.624 51.562,40.132 47.498,41.656 47.498,43.688 40.894,46.228 15.748,48.768 17.272,49.276 18.542,49.53 22.86,51.816 9.652,53.594 42.164,53.594 29.972,54.102 33.02,54.102 48.768,54.864 31.496,55.626 26.924,56.388 29.972,57.404 33.02,57.404 26.924,57.912
ISP_UART_RX: D5.K P4.3 | length 85.9
  Top Layer w0.254: v1(25.654,9.398) 28.448,12.192 43.18,12.192 v1(43.942,12.954) ; D5.K@58.448,20.074 59.698,20.074 ; v1(60.198,20.574) 59.698,20.074 ; v1@25.654,9.779 ccw(c25.654,10.699) 26.304,10.048 ; v1@25.654,9.779 ccw(c25.654,10.699) 26.304,10.048 ; v1@25.654,9.779 ccw(c25.654,10.699) 26.304,10.048 ; v1@26.035,9.398 cw(c26.955,9.398) 26.304,10.048 ; v1@26.035,9.398 cw(c26.955,9.398) 26.304,10.048 ; v1@26.035,9.398 cw(c26.955,9.398) 26.304,10.048 ; 43.292,12.304 ccw(c42.641,12.954) v1@43.561,12.954 ; 43.292,12.304 cw(c43.942,11.653) v1@43.942,12.573 ; 43.292,12.304 ccw(c42.641,12.954) v1@43.561,12.954 ; 43.292,12.304 cw(c43.942,11.653) v1@43.942,12.573 ; 43.292,12.304 ccw(c42.641,12.954) v1@43.561,12.954 ; 43.292,12.304 cw(c43.942,11.653) v1@43.942,12.573 ; D5.K@58.946,19.699 cw(c59.698,19.132) 59.698,20.074 ; D5.K@58.946,19.699 cw(c59.698,19.132) 59.698,20.074 ; D5.K@58.946,19.699 cw(c59.698,19.132) 59.698,20.074 ; D5.K@58.946,20.449 ccw(c59.698,21.015) 59.698,20.074 ; D5.K@58.946,20.449 ccw(c59.698,21.015) 59.698,20.074 ; D5.K@58.946,20.449 ccw(c59.698,21.015) 59.698,20.074
  Bottom Layer w0.254: v1(25.654,9.398) 25.78,9.272 P4.3@25.78,4 ; v1(43.942,12.954) 53.594,12.954 54.356,13.716 54.356,20.574 55.372,21.59 59.182,21.59 v1(60.198,20.574) ; v1@25.385,9.129 cw(c24.43,8.174) 25.78,8.174 ; v1@25.385,9.129 cw(c24.43,8.174) 25.78,8.174 ; v1@25.385,9.129 cw(c24.43,8.174) 25.78,8.174 ; P4.3@25.421,4.359 ccw(c24.554,5.226) 25.78,5.226 ; P4.3@25.421,4.359 ccw(c24.554,5.226) 25.78,5.226 ; P4.3@25.421,4.359 ccw(c24.554,5.226) 25.78,5.226 ; v1@25.564,9.308 cw(c25.043,8.787) 25.78,8.787 ; v1@25.564,9.308 cw(c25.043,8.787) 25.78,8.787 ; v1@25.564,9.308 cw(c25.043,8.787) 25.78,8.787 ; 25.78,5.226 ccw(c27.006,5.226) P4.3@26.139,4.359 ; 25.78,5.226 ccw(c27.006,5.226) P4.3@26.139,4.359 ; 25.78,5.226 ccw(c27.006,5.226) P4.3@26.139,4.359 ; 25.78,8.782 cw(c26.27,8.782) v1@25.923,9.129 ; 25.78,8.782 cw(c26.27,8.782) v1@25.923,9.129 ; 25.78,8.782 cw(c26.27,8.782) v1@25.923,9.129 ; v1@44.211,12.685 cw(c44.862,12.034) 44.862,12.954 ; v1@44.211,12.685 cw(c44.862,12.034) 44.862,12.954 ; v1@44.211,12.685 cw(c44.862,12.034) 44.862,12.954 ; v1@44.211,13.223 ccw(c44.862,13.874) 44.862,12.954 ; v1@44.211,13.223 ccw(c44.862,13.874) 44.862,12.954 ; v1@44.211,13.223 ccw(c44.862,13.874) 44.862,12.954 ; 59.548,21.224 ccw(c60.198,21.875) v1@60.198,20.955 ; 59.548,21.224 cw(c58.897,20.574) v1@59.817,20.574 ; 59.548,21.224 ccw(c60.198,21.875) v1@60.198,20.955 ; 59.548,21.224 cw(c58.897,20.574) v1@59.817,20.574 ; 59.548,21.224 ccw(c60.198,21.875) v1@60.198,20.955 ; 59.548,21.224 cw(c58.897,20.574) v1@59.817,20.574